# EAGLE board BMS Segment rev14 Mechanical Outline (EAGLE 9.6.2)

Size 108 x 240.25 mm. Coordinates in mm from the lower left corner, seen from the top.
Outline: 9,223.93 9,183.93 0,183.93 0,143.99 9,143.99 9,103.99 0,103.99 0,64.05 9,64.05 9,22.77 0,22.77 0,0 95.3,0 95.3,28.7 108,28.7 108,212.82 95.3,212.82 95.3,240.25 0,240.25 0,223.93 9,223.93
Copper layers (1*16): Top 0.035mm / dielectric 1.5mm / Bottom 0.035mm
Design rules "Advanced Circuits (2 Layer) *": minimum track width 5mil, minimum drill 10mil, track to track 5mil, track to pad 5mil, pad to pad 5mil, via to via 5mil, smd to smd 5mil, copper to edge 10mil, drill to drill 6mil, minimum pad ring 7mil, minimum via ring 5mil, stop-mask expansion 2.5mil, vias tented up to drill 30mil, thermal gap 10mil
Net classes: 1 unfused_hv: clearance 0.025 mm to class 0, clearance 3.2 mm

## Footprints (pad centres in the part's own frame; a part is rotated, then mirrored left to right if it is on the bottom)
CONTACT_SPRING = drill 0.737 pad 1.829: P$1 0,0
M4_MOUNTING = hole 4.5: 0,0

## Placement (x,y rotation side)
CELL0  BATTERY_SPRING_SPRING_CONTACT  [CONTACT_SPRING]  77.47,5.33 270 bottom
CELL1  BATTERY_SPRING_SPRING_CONTACT  [CONTACT_SPRING]  33.53,11.43 270 bottom
CELL2  BATTERY_SPRING_SPRING_CONTACT  [CONTACT_SPRING]  73.91,34.04 270 bottom
CELL3  BATTERY_SPRING_SPRING_CONTACT  [CONTACT_SPRING]  33.53,36.58 270 bottom
CELL4  BATTERY_SPRING_SPRING_CONTACT  [CONTACT_SPRING]  73.91,58.67 270 bottom
CELL5  BATTERY_SPRING_SPRING_CONTACT  [CONTACT_SPRING]  33.53,61.21 270 bottom
CELL6  BATTERY_SPRING_SPRING_CONTACT  [CONTACT_SPRING]  73.91,83.31 270 bottom
CELL7  BATTERY_SPRING_SPRING_CONTACT  [CONTACT_SPRING]  33.53,85.85 270 bottom
CELL8  BATTERY_SPRING_SPRING_CONTACT  [CONTACT_SPRING]  73.91,107.95 270 bottom
CELL9  BATTERY_SPRING_SPRING_CONTACT  [CONTACT_SPRING]  33.53,110.49 270 bottom
CELL10  BATTERY_SPRING_SPRING_CONTACT  [CONTACT_SPRING]  73.91,132.59 270 bottom
CELL11  BATTERY_SPRING_SPRING_CONTACT  [CONTACT_SPRING]  33.53,135.38 270 bottom
CELL12  BATTERY_SPRING_SPRING_CONTACT  [CONTACT_SPRING]  73.91,157.48 270 bottom
CELL13  BATTERY_SPRING_SPRING_CONTACT  [CONTACT_SPRING]  33.53,160.02 270 bottom
CELL14  BATTERY_SPRING_SPRING_CONTACT  [CONTACT_SPRING]  73.91,182.12 270 bottom
CELL15  BATTERY_SPRING_SPRING_CONTACT  [CONTACT_SPRING]  33.53,184.66 270 bottom
CELL16  BATTERY_SPRING_SPRING_CONTACT  [CONTACT_SPRING]  73.91,206.76 270 bottom
CELL17  BATTERY_SPRING_SPRING_CONTACT  [CONTACT_SPRING]  33.53,209.3 270 bottom
CELL18  BATTERY_SPRING_SPRING_CONTACT  [CONTACT_SPRING]  77.47,234.95 270 bottom
U$9  [M4_MOUNTING]  53.85,170.69 0 top
U$10  [M4_MOUNTING]  5,178.94 0 top
U$11  [M4_MOUNTING]  5,98.99 0 top
U$12  [M4_MOUNTING]  5,69.05 0 top
U$13  [M4_MOUNTING]  5,11.67 0 top
U$14  [M4_MOUNTING]  101.65,38.11 0 top
U$15  [M4_MOUNTING]  103.65,201.99 0 top
U$16  [M4_MOUNTING]  103.65,158.99 0 top
U$17  [M4_MOUNTING]  101.65,88.99 0 top
U$18  [M4_MOUNTING]  53.85,72.14 0 top
U$19  [M4_MOUNTING]  53.85,121.41 0 top
U$26  [M4_MOUNTING]  5,234.28 0 top
U$27  [M4_MOUNTING]  5,148.99 0 top

## Library data of the parts
CELL0 CELL1-CELL18 U$9-U$19 U$26 U$27 = HyTechDevices